# Altium PCB PCB1.PcbDoc
Units mm, origin at the board's own origin, x right, y up, seen from the top; angles counter-clockwise.
Board outline 40.51 x 17.27 mm, 2 copper layers (Top Layer, Bottom Layer); 26 components, 22 nets, 100 pads, 27 vias.
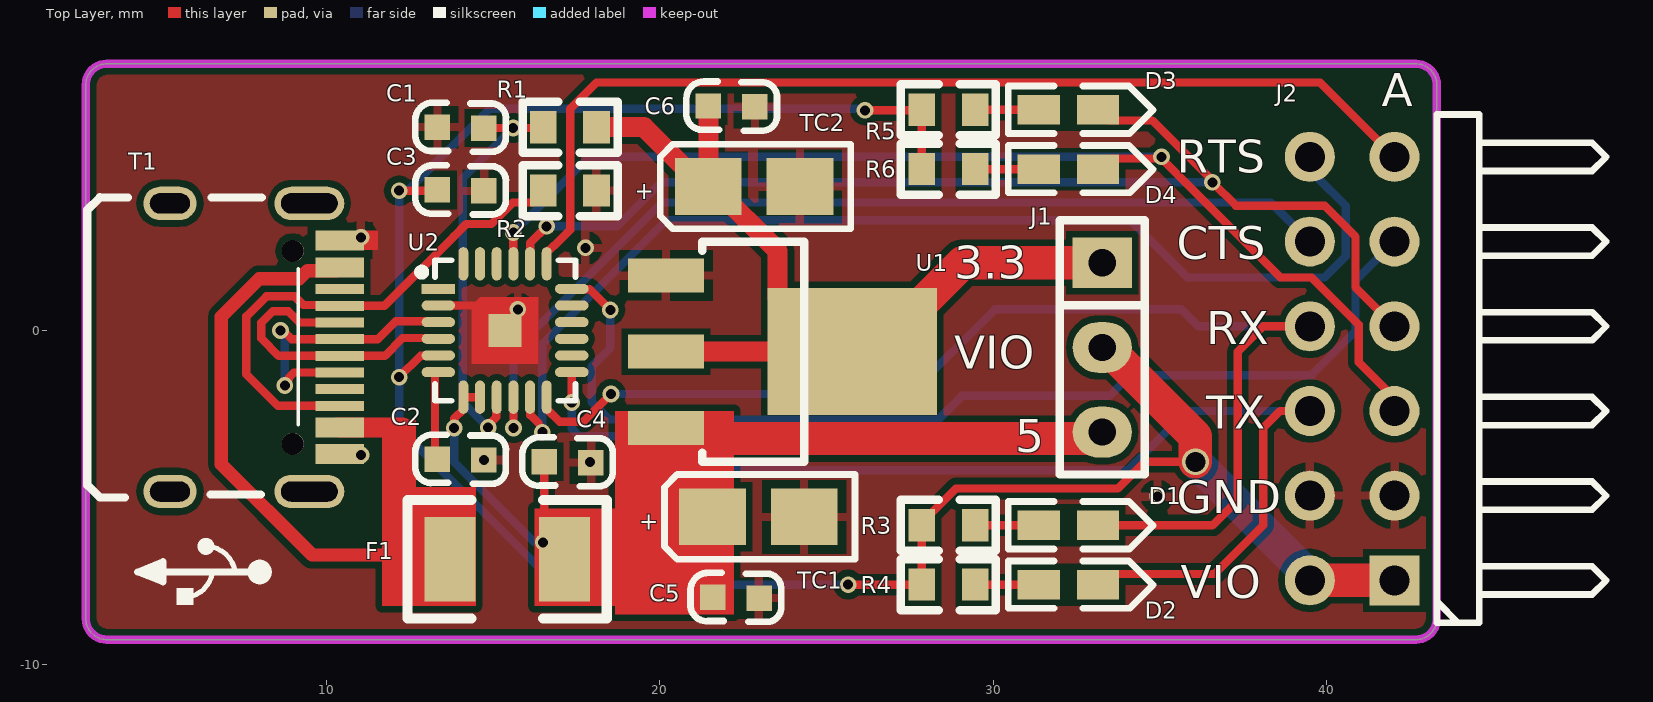
[diagram p0: Top Layer view]
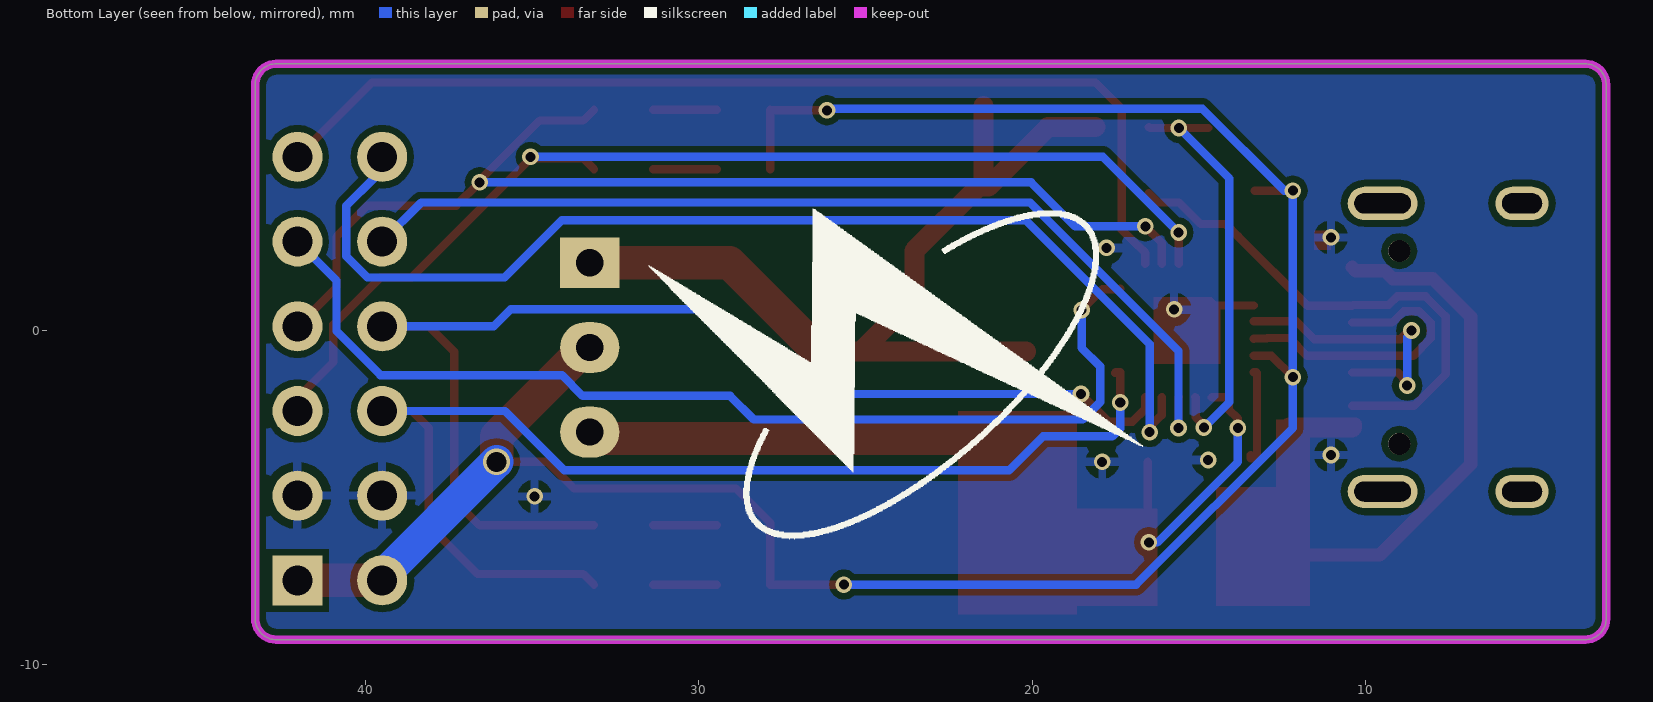
[diagram p1: Bottom Layer view, seen from below]
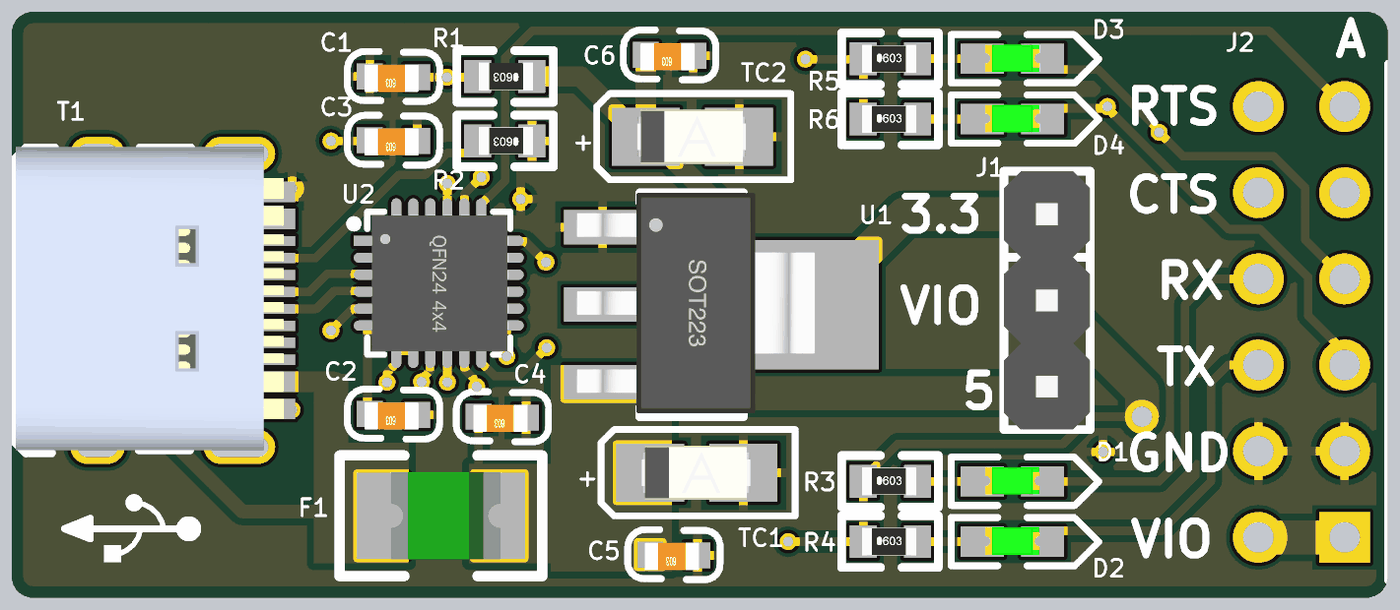
[diagram p2: 3D render of the assembled board from above, using the file's embedded part models]

## Layer stack, top to bottom
Top Solder: solder mask 0.0102, Solder Resist, Dk 3.5
Top Layer: signal copper 0.0356
Dielectric 1: dielectric 0.32, FR-4, Dk 4.8
Bottom Layer: signal copper 0.0356
Bottom Solder: solder mask 0.0102, Solder Resist, Dk 3.5

## Board outline
2.794,-8.636 2.794,7.364 cw(c3.429,7.364) 3.429,7.999 42.672,7.999 cw(c42.672,7.364) 43.307,7.364 43.307,-8.636 cw(c42.672,-8.636) 42.672,-9.271 3.429,-9.271 cw(c3.429,-8.636)

## Design rules (kind name [scope] priority, off if disabled: settings)
Clearance [All] p1: gap=0.2 ignorepadtopadclearanceinfootprint=FALSE
DiffPairsRouting [All] p1: maxlimit=0.254 minlimit=0.25 mostfreqgap=0.25 toplayer_minwidth=0.25 toplayer_maxwidth=0.25 toplayer_prefwidth=0.25 bottomlayer_minwidth=0.25 bottomlayer_maxwidth=0.25 bottomlayer_prefwidth=0.25 maxuncoupledlength=12.7
PolygonConnect [All] p1: connectstyle=Relief reliefconductorwidth=0.254 reliefentries=4 polygonreliefangle="90 Angle" airgapwidth=0.254
RoutingVias [All] p1: holewidth=0.711 width=1.27 viastyle="Through Hole" minholewidth=0.711 minwidth=1.27 maxholewidth=0.711 maxwidth=1.27
SilkToSilkClearance [All] p1: silktosilkclearance=0
SolderMaskExpansion [All] p1: expansion=0.102
Width Width_2 [InNet('USB_5V')] p1: maxlimit=1 minlimit=0.4 preferedwidth=1
Width Width_3 [InNet('3.3V')] p2: maxlimit=1 minlimit=0.6 preferedwidth=1
Width Width_4 [InNet('5V')] p3: maxlimit=1 minlimit=0.6 preferedwidth=1
Width [InNet('VIO')] p4: maxlimit=1 minlimit=0.2 preferedwidth=1
Width Width_1 [All] p5: maxlimit=0.25 minlimit=0.25 preferedwidth=0.25
28 further rules are at their usual default settings.

## Classes and differential pairs
component class Sheet1: C1 C2 C3 C4 C5 C6 D1 D2 D3 D4 F1 J1 J2 R1 R2 R3 R4 R5 R6 TC1 TC2 U1 U2
differential pair USB_D: +USB_D_P -USB_D_N

## Components (designator, comment, footprint, x,y, rotation, side; value= is the part's Value field where it differs from the comment)
C1 "4.7uf" 0603C 14.737,6.062 r180 top
C2 "100nf" 0603C 14.737,-3.893 r180 top
C3 "1uf" 0603C 14.737,4.182 r180 top
C4 "1uf" 0603C 17.943,-3.971 r180 top
C5 "0.1uf" 0603C 22.992,-8.035 r180 top
C6 "0.1uf" 0603C 22.865,6.697 r180 top
D1 "LED" LED-0603B 31.369,-5.849 r0 top
D2 "LED" LED-0603B 31.369,-7.627 r0 top
D3 "LED" LED-0603B 31.369,6.611 r0 top
D4 "LED" LED-0603B 31.369,4.833 r0 top
F1 "FUSE" FUSE-1210 13.767,-6.909 r0 top
J1 "Pin HDR1X3" "Pin HDR1X3/2.54mm-S" 33.274,2.032 r0 top
J2 "Pin HDR2X6" "Pin HDR2X6/2.54mm-W" 42.037,-7.493 r90 top
R1 "4.7K" 0603R 18.11,6.096 r180 top
R2 "5K1" 0603R 18.11,4.194 r180 top
R3 "220R" 0603R 27.864,-5.842 r0 top
R4 "220R" 0603R 27.864,-7.62 r0 top
R5 "220R" 0603R 27.864,6.617 r0 top
R6 "220R" 0603R 27.864,4.839 r0 top
T1 "USB-TYPE-C-12P" type-c-12p 6.477,0.025 r0 top
TC1 "10uf" TAJ-A/3216 21.543,-5.588 r0 top
TC2 "10uf" TAJ-A/3216 21.416,4.318 r0 top
U1 "AMS1117" SOT223 20.193,-0.635 r270 top
U2 "CH342F" "QFN24-PAD 4X4" 15.367,-0.025 r270 top (schematic designator *)
? "Comment" LOGO_Thunder 31.623,-6.254 r90 bottom
? "Comment" USB_LOGO 8.061,-7.239 r90 top

## Footprints (in the part's own frame and the unit in brackets; to place one, negate y for a bottom-side part, rotate by r counter-clockwise, add the part's x,y. Pads: shape width x height; smd on the part's side, far side on the other; paste and mask are expansions set on the pad)
0603C [mil]
  rect 30x30 smd: 1(0.21,-0.35) 2(55.21,-1.35)
  silkscreen extent -26,-30 81,28, body extent -1,-15 62,17, height 12
0603R [mm]
  rect 0.8x0.965 smd: 1(0,0) 2(1.6,0)
  silkscreen extent -0.64,-0.76 2.21,0.76, body extent -0.04,-0.41 1.56,0.41, height 0.45
FUSE-1210 [mil]
  rect 60x100 smd: 1(-2,2) 2(133,2)
  silkscreen extent -52,-68 183,72, body extent 8,-49 134,53, height 27
LED-0603B [mil]
  rect 50x35 smd: A(0,0.26) K(70,0.26)
  silkscreen extent -36,-28 135,28, body extent 4,-15 66,17, height 24
LOGO_Thunder [mm]
  silkscreen extent 0,-14.94 9.91,-0.13
"Pin HDR1X3/2.54mm-S" [mil]
  rect 70x60 hole 32: 1(0,0)
  oval 70x60 hole 32: 2(0,-100) 3(0,-200)
  silkscreen extent -50,-250 50,50, body extent -50,-250 50,50, height 336
"Pin HDR2X6/2.54mm-W" [mm] "Connector; Header; 6x2 Position; Right Angle"
  rect 1.5x1.5 hole 0.9: 1(0,0)
  round 1.5 hole 0.9: 2(0,2.54) 3(2.54,0) 4(2.54,2.54) 5(5.08,0) 6(5.08,2.54) 7(7.62,0) 8(7.62,2.54) 9(10.16,0) 10(10.16,2.54) 11(12.7,0) 12(12.7,2.54)
  silkscreen extent -1.27,-6.35 13.97,-1.27, body extent -1.27,-10 13.97,2.89, height 5.08
"QFN24-PAD 4X4" [mm]
  rect 0.3x1 smd: 1(-1.275,-2)
  oval 0.3x1 smd: 2(-0.775,-2) 3(-0.275,-2) 4(0.225,-2) 5(0.725,-2) 6(1.225,-2) 13(1.225,2) 14(0.725,2) 15(0.225,2) 16(-0.275,2) 17(-0.775,2) 18(-1.275,2)
  oval 1x0.3 smd: 7(1.975,-1.25) 8(1.975,-0.75) 9(1.975,-0.25) 10(1.975,0.25) 11(1.975,0.75) 12(1.975,1.25) 19(-2.025,1.25) 20(-2.025,0.75) 21(-2.025,0.25) 22(-2.025,-0.25) 23(-2.025,-0.75) 24(-2.025,-1.25)
  rect 1x1 smd: 25(-0.025,0)
  Top Layer region: -1.025,1 0.975,1 0.975,-1 -0.775,-1 -1.025,-0.75
  silkscreen extent -2.13,-2.6 2.08,2.11, body extent -2.04,-1.98 1.98,2.04, height 0.98
SOT223 [mil]
  rect 40x90 smd: 1(-90,0) 2(0,0) 3(90,0)
  rect 150x200 smd: 2(0,220)
  silkscreen extent -130,43 130,163, body extent -130,-30 126,246, height 65
TAJ-A/3216 [mm]
  rect 2x1.7 smd: 1(0.047,0) 2(2.794,0)
  silkscreen extent -1.4,-1.27 4.32,1.27, body extent -0.2,-0.8 3,0.8, height 1.6
type-c-12p [mm]
  oval 1.6x1 hole 0.6 slot 1.2 at 0 deg: 0(-1.158,-4.853) 0(-1.158,3.787)
  oval 2.1x1 hole 0.6 slot 1.7 at 0 deg: 0(3.022,-4.853) 0(3.022,3.787)
  round 0.66 hole 0.66: 4(2.522,-3.423) 4(2.522,2.357)
  rect 1.45x0.6 smd: A1B12(3.937,2.667) A4B9(3.937,1.867) B1A12(3.937,-3.733) B4A9(3.937,-2.933)
  rect 1.45x0.3 smd: A5(3.937,0.717) A6(3.937,-0.283) A7(3.937,-0.783) A8(3.937,-1.783) B5(3.937,-2.283) B6(3.937,-1.283) B7(3.937,0.217) B8(3.937,1.217)
  silkscreen extent -3.63,-5.03 2.69,3.97, body extent -3.57,-4.95 4.33,3.99, height 3.2
USB_LOGO [mm]
  silkscreen extent -0.99,-0.12 0.89,3.71

## Part data
C1 C2 C3 C4 C5 C6: library part CAP, "无极性电容"
R1 R2 R3 R4 R5 R6: library part RES, "贴片电阻"
TC1 TC2: library part TCAP, "钽电容"
U1: "三端稳压芯片"

## Via types
v1: diameter 0.5, hole 0.3, Top Layer to Bottom Layer, 26 vias
v2: diameter 0.8, hole 0.6, Top Layer to Bottom Layer, 1 vias

## Nets (pads, with @x,y where several pads share a name; then routed paths per layer and width w, separated by ;. In a path a pad name is that pad's centre, name@x,y a point inside that pad or via, vN(x,y) a via of type N, cw(c..) or ccw(c..) an arc to the next point about the centre after c; other vN are vias at no path point)
3.3V: C6.2 J1.1 R1.1 TC2.1 U1.2 | length 27.4
  Top Layer w0.6: R1.1 19.535,6.096 21.313,4.318 TC2.1 ; U1.2@20.193,-0.635 U1.2@25.146,-0.635 ; C6.2 TC2.1 ; U1.2@25.781,-0.635 U1.2@25.146,-0.635 ; J1.1 J1.1@33.401,2.032 ; TC2.1 21.613,4.318 23.541,2.39 23.541,0.97 U1.2@25.146,-0.635
  Top Layer w1: U1.2@25.781,-0.635 26.416,-0.635 29.083,2.032 J1.1
5V: C4.2 C5.2 F1.2 J1.3 TC1.1 U1.3 U2.7 U2.8 | length 22
  Top Layer w0.25: v1(13.843,-2.921) 13.843,-2.638 14.117,-2.364 U2.7 U2.8 U2.8@14.627,-2.01 ; C4.2 16.541,-6.254 F1.2 ; U1.3 U1.3@20.249,-2.865 ; J1.3@33.091,-2.865 J1.3
  Top Layer w1: 21.209,-3.556 21.525,-3.24 32.813,-3.24 33.005,-3.048 J1.3
  Bottom Layer w0.25: v1(13.843,-2.921) 13.843,-3.937 16.256,-6.35 v1(16.51,-6.35)
A_CTS: J2.9 U2.18 | length 31.8
  Top Layer w0.25: U2.18 17.377,1.24 17.898,1.24 v1(18.523,0.616)
  Bottom Layer w0.25: v1(18.523,0.616) 18.523,-0.52 17.967,-1.075 17.967,-2.143 18.491,-2.667 28.357,-2.667 29.063,-1.961 33.485,-1.961 34.108,-1.338 39.552,-1.338 40.87,-0.02 40.87,1.5 J2.9
A_RTS: J2.11 U2.19 | length 30.9
  Top Layer w0.25: U2.19 16.617,2.336 16.83,2.55 16.855,2.55 17.318,3.012 17.318,6.646 18.109,7.437 39.807,7.437 J2.11
A_RX: D3.K J2.7 U2.20 | length 34.3
  Top Layer w0.25: U2.20 16.127,2.01 16.127,2.634 v1(16.617,3.125) ; D3.K 33.467,6.298 34.775,6.298 36.576,4.496 v1(36.576,4.445) 37.279,3.742 39.942,3.742 40.87,2.814 40.87,1.294 J2.7
  Bottom Layer w0.25: v1(16.617,3.125) 18.719,3.125 20.039,4.445 v1(36.576,4.445)
A_TX: D4.K J2.5 U2.21 | length 34.4
  Top Layer w0.25: U2.21 v1(15.617,2.938) ; D4.K 33.467,5.159 34.936,5.159 35.049,5.159 38.616,1.592 39.552,1.592 40.962,0.182 40.962,-0.948 41.798,-1.784 41.798,-2.174 J2.5
  Bottom Layer w0.25: v1(15.617,2.938) 17.886,5.207 v1(35.052,5.207)
B_CTS: J2.10 U2.10 | length 29.4
  Top Layer w0.25: U2.10 15.619,-2.002 15.619,-2.919 v1(15.621,-2.921)
  Bottom Layer w0.25: v1(15.621,-2.921) 15.621,-0.61 20.067,3.837 38.327,3.837 J2.10
B_RTS: J2.12 U2.11 | length 33.6
  Top Layer w0.25: U2.11 16.127,-2.01 16.127,-2.538 16.383,-2.794
  Bottom Layer w0.25: v1(16.485,-3.048) 16.485,-0.406 20.193,3.302 34.115,3.302 35.825,1.592 39.942,1.592 40.572,2.222 40.572,3.742 39.736,4.578 39.736,4.968 J2.12
B_RX: D1.K J2.8 U2.12 | length 36.4
  Top Layer w0.25: U2.12 16.617,-2.35 17.001,-2.734 17.713,-2.734 v1(18.542,-1.905) ; D1.K 36.576,-5.842 37.338,-5.08 37.338,-0.635 38.1,0.127 J2.8
  Bottom Layer w0.25: v1(18.542,-1.905) 27.516,-1.905 30.056,0.635 35.646,0.635 36.154,0.127 J2.8
B_TX: D2.K J2.6 U2.13 | length 35.5
  Top Layer w0.25: v1(17.367,-2.159) U2.13 17.503,-1.25 U2.13@17.526,-1.273 ; D2.K 33.466,-7.301 36.641,-7.301 38.1,-5.842 38.1,-2.921 38.608,-2.413 J2.6
  Bottom Layer w0.25: v1(17.367,-2.159) 17.367,-2.938 17.604,-3.175 19.685,-3.175 20.701,-4.191 34.036,-4.191 35.814,-2.413 J2.6
GND: C1.2 C2.1 C3.1 C4.1 C5.1 C6.1 J2.3 J2.4 R2.1 T1.A1B12 T1.B1A12 TC1.2 TC2.2 U1.1 U2.2 U2.25 | length 2.4
  Top Layer w0.25: U2.2 15.565,0.75 15.68,0.635 v1(15.748,0.635)
  other v1: 34.925,-4.973 17.907,-3.937 14.732,-3.884 11.049,-3.734 17.78,2.479 11.049,2.794
Net*_6: C2.2 U2.6 | length 2.9
  Top Layer w0.25: U2.6 13.291,-1.25 13.268,-1.273 13.268,-3.735 13.363,-3.83 13.458,-3.735 C2.2@13.458,-3.83
NetD1_A: D1.A R3.2 | length 1.9
  Top Layer w0.25: R3.2 D1.A
NetD2_A: D2.A R4.2 | length 1.9
  Top Layer w0.25: R4.2 D2.A
NetD3_A: D3.A R5.2 | length 1.9
  Top Layer w0.25: R5.2 D3.A
NetD4_A: D4.A R6.2 | length 1.9
  Top Layer w0.25: R6.2 D4.A
NetR2_2: R2.2 T1.A5 T1.B5 | length 15.6
  Top Layer w0.25: T1.B5 8.556,-2.258 7.611,-1.312 7.611,0.425 8.211,1.025 9.061,1.025 9.318,0.767 10.389,0.767 T1.A5 11.75,0.742 13.832,2.825 14.203,3.196 14.958,3.196 15.599,3.837 16.235,3.837 R2.2@16.51,4.112
RST: C1.1 R1.2 U2.9 | length 12.7
  Top Layer w0.25: C1.1 v1(15.608,6.071) 16.485,6.071 R1.2 ; v1(14.859,-2.908) 14.859,-2.84 15.107,-2.592 15.107,-2.01 U2.9
  Bottom Layer w0.25: v1(14.859,-2.908) 14.097,-2.146 14.097,4.559 v1(15.608,6.071)
USB_5V: F1.1 T1.A4B9 T1.B4A9 | length 17.6
  Top Layer w0.4: T1.B4A9@10.314,-2.808 T1.B4A9 ; T1.A4B9 10.314,1.792 9.441,1.792 9.199,1.55 7.994,1.55 6.858,0.414 6.858,-4.009 9.58,-6.731 12.192,-6.731
  Top Layer w0.6: T1.B4A9 12.293,-2.908 ; F1.1 F1.1@13.716,-6.35
USB_D_N: T1.A7 T1.B7 U2.4 | length 8.9
  Top Layer w0.25: T1.B7 9.207,0.242 8.874,0.575 8.398,0.575 8.061,0.238 8.061,-0.238 8.58,-0.758 11.761,-0.758 12.293,-0.225 12.957,-0.225 12.972,-0.24 13.357,-0.24 U2.4
USB_D_P: T1.A6 T1.B6 U2.3 | length 8.6
  Top Layer w0.25: v1(8.636,0) 8.704,0 8.961,-0.258 T1.A6 11.553,-0.258 12.086,0.275 U2.3@13.367,0.275 ; v1(8.763,-1.651) 8.763,-1.583 8.888,-1.458 8.888,-1.404 9.034,-1.258 T1.B6
  Bottom Layer w0.25: v1(8.636,0) 8.636,-0.068 8.763,-0.195 v1(8.763,-1.651)
VIO: C3.2 J1.2 J2.1 J2.2 R3.1 R4.1 R5.1 R6.1 U2.5 | length 69.2
  Top Layer w0.25: v1(12.192,-1.397) 12.829,-0.76 13.357,-0.76 U2.5 ; v1(12.192,4.191) C3.2@13.335,4.191 ; v1(25.654,-7.62) R4.1 R3.1 27.864,-5.76 28.885,-4.739 33.742,-4.739 34.544,-3.937 v2(36.068,-3.937) ; v1(26.162,6.604) 27.851,6.604 R5.1 R6.1 ; J1.2 J1.2@33.535,-0.769
  Top Layer w1: J1.2 33.401,-0.508 36.068,-3.175 v2(36.068,-3.937) ; J2.2 J2.1
  Bottom Layer w0.25: v1(25.654,-7.62) 16.89,-7.62 12.192,-2.922 v1(12.192,-1.397) v1(12.192,4.191) 12.446,4.191 14.901,6.646 26.12,6.646 v1(26.162,6.604)
  Bottom Layer w1: v2(36.068,-3.937) 39.497,-7.366 J2.2
pads on no net: T1.0 T1.4 T1.A8 T1.B8 U2.1 U2.14 U2.15 U2.16 U2.17 U2.22 U2.23 U2.24

## Polygon pours and split planes (outlines as drawn)
GND on Top Layer "GND_L01_P028" (solid, remove dead copper, pour order 28): 1.016,9.906 46.863,9.906 47.244,9.525 46.228,8.509 46.228,-10.922 1.778,-10.922 1.524,-11.176
GND on Bottom Layer "GND_L02_P030" (solid, remove dead copper, pour order 30): 1.651,9.652 2.032,9.271 48.387,9.271 48.387,-10.541 46.228,-12.7 45.085,-11.557 0.889,-11.557

## Keep-outs
Keep-Out Layer:
  the board outline again, w0.254

## Other copper
Top Layer:
  rectangle net GND: 11.049,2.413 11.557,2.994
  rectangle net 5V: 16.256,-8.255 19.177,-5.334
  rectangle net 5V: 18.669,-8.509 22.225,-2.413
  rectangle net USB_5V: 11.684,-4.953 12.7,-2.667
  rectangle net USB_5V: 11.684,-8.255 14.492,-4.699

## Silkscreen, mask and mechanical layers (free items; w line width, h text height)
Top Overlay:
  text "RTS" at 35.501,4.732 h1
  text "CTS" at 35.501,2.135 h1
  text "3.3" at 28.829,1.55 h1
  text "RX" at 36.39,-0.405 h1
  text "VIO" at 28.829,-1.143 h1
  text "TX" at 36.39,-2.945 h1
  text "5" at 30.662,-3.658 h1
  text "GND" at 35.501,-5.485 h1
  text "VIO" at 35.628,-8.025 h1

## Dimensions
-0.254,7.999 to -1.651,-9.271 on Top Overlay
2.794,12.065 to 43.307,12.446 on Top Overlay

## Text inside footprints (layer, text, board x,y; h text height)
J2: Top Overlay "A" at 41.656,6.731 h1
TC1: Top Overlay "+" at 19.384,-5.969 h0.5
TC2: Top Overlay "+" at 19.257,3.937 h0.5